# EAGLE board controllerpro (EAGLE 7.3.0)
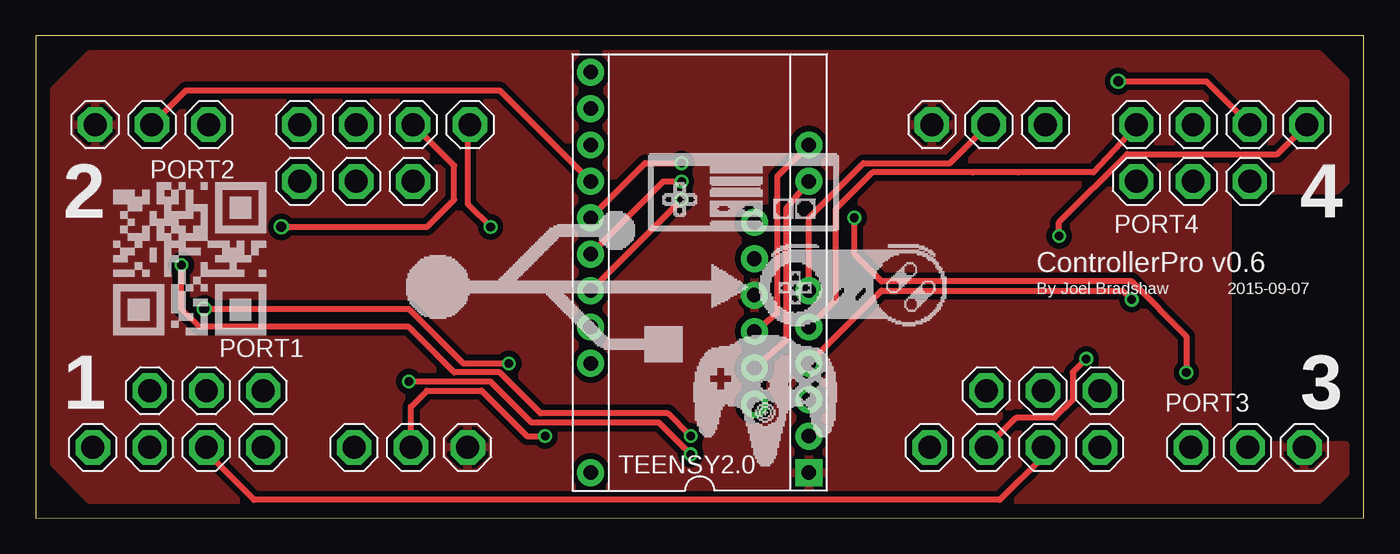
[diagram p0: board, top side]
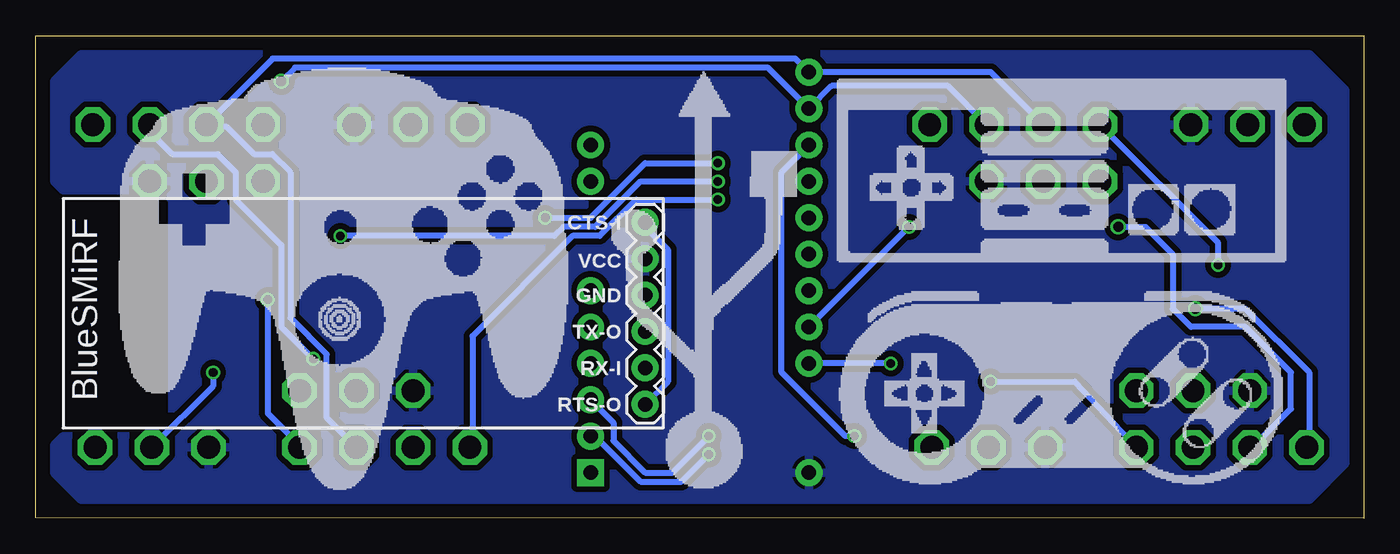
[diagram p1: board, bottom side, seen from below]

Size 92.71 x 33.66 mm. Coordinates in mm from the lower left corner, seen from the top.
Outline: 92.71,33.66 0,33.66 0,0 92.71,0.01 92.71,33.66
Copper layers (1*16): Top 0.0356mm / dielectric 1.5011mm / Bottom 0.0356mm
Design rules "LaenPCBOrder": minimum track width 6mil, minimum drill 13mil, track to track 6mil, track to pad 6mil, pad to pad 6mil, via to via 6mil, smd to smd 6mil, copper to edge 15mil, drill to drill 6mil, minimum pad ring 7mil, minimum via ring 7mil, stop-mask expansion 3mil, vias tented up to drill 0mil, thermal gap 10mil
Net classes: 0 default: width 0.406 mm, clearance 0.203 mm; 1 power: width 0.61 mm, clearance 0.305 mm

## Footprints (pad centres in the part's own frame; a part is rotated, then mirrored left to right if it is on the bottom)
NINTENDO-MULTI = drill 1.6 octagon: 1 -11.887,-3.962; 2 -7.925,-3.962; 3 -3.962,-3.962; 4 0,-3.962; 5 6.35,-3.962; 6 10.312,-3.962; 7 14.275,-3.962; 8 0,0; 9 -3.962,0; 10 -7.925,0
TEENSY_MC_BT_PINS = drill 1.016 pad 1.88: +5V -13.97,7.62; B0 -11.43,-7.62; B1 -8.89,-7.62; B2 -6.35,-7.62; B3 -3.81,-7.62; B4 8.89,7.62; B5 6.35,7.62; B6 3.81,7.62; B7 -1.27,-7.62; D2 6.35,-7.62; D3 8.89,-7.62; D6 13.97,7.62; D7 11.43,7.62; F4 -6.35,7.62; F5 -3.81,7.62; F6 -1.27,7.62; F7 1.27,7.62 | drill 1.016 pad 1.88 square: GND -13.97,-7.62
RN42 = drill 1.016 pad 1.88: CTS-I 0,6.35; GND 0,1.27; RTS-0 0,-6.35; RX-I 0,-3.81; TX-0 0,-1.27; VCC 0,3.81

## Placement (x,y rotation side)
PORT1  NINTENDO-MULTI  [NINTENDO-MULTI]  15.88,8.89 0 top
PORT2  NINTENDO-MULTI  [NINTENDO-MULTI]  18.41,23.5 180 top
PORT3  NINTENDO-MULTI  [NINTENDO-MULTI]  74.3,8.89 0 top
PORT4  NINTENDO-MULTI  [NINTENDO-MULTI]  76.83,23.5 180 top
TEENSY2.0  TEENSY_MC_BT_PINS  [TEENSY_MC_BT_PINS]  46.35,17.14 90 top
U$1  RN42  [RN42]  50.16,14.29 0 bottom

## Library data of the parts
PORT1-PORT4 TEENSY2.0 U$1 = custom

## Nets
3VDATA0: PORT3.6 TEENSY2.0.B6
3VDATA1: PORT4.6 TEENSY2.0.B7
3VDATA2: PORT1.6 TEENSY2.0.B4
3VDATA3: PORT2.6 TEENSY2.0.B5
5VDATA0: PORT3.4 TEENSY2.0.B2
5VDATA1: PORT4.4 TEENSY2.0.B3
5VDATA2: PORT1.4 TEENSY2.0.B0
5VDATA3: PORT2.4 TEENSY2.0.B1
CLOCK: PORT1.2 PORT2.2 PORT3.2 PORT4.2 TEENSY2.0.D7
GND [power]: PORT1.7 PORT2.7 PORT3.7 PORT4.7 TEENSY2.0.GND U$1.GND
LATCH: PORT1.3 PORT2.3 PORT3.3 PORT4.3 TEENSY2.0.D6
N$2: TEENSY2.0.D2 U$1.RX-I
N$5: TEENSY2.0.D3 U$1.TX-0
N$6: U$1.CTS-I U$1.RTS-0
S_OR_NES0: PORT3.1 TEENSY2.0.F6
S_OR_NES1: PORT4.1 TEENSY2.0.F7
S_OR_NES2: PORT1.1 TEENSY2.0.F4
S_OR_NES3: PORT2.1 TEENSY2.0.F5
VCC [power]: PORT1.5 PORT1.10 PORT2.5 PORT2.10 PORT3.5 PORT3.10 PORT4.5 PORT4.10 TEENSY2.0.+5V U$1.VCC

## Tracks (layer width: path | path; a pad name or v marks a point on that pad's centre or on a via)
3VDATA0  (via drill 0.6)
  Top 0.406: v57.15,20.95 57.15,18.41 59.05,16.51 76.52,16.51 80.33,12.7 v80.33,10.16 | TEENSY2.0.B6 42.55,24.77 v45.09,24.77
  Bottom 0.406: v57.15,20.95 53.98,20.95 50.16,24.77 v45.09,24.77 | v80.33,10.16 80.33,9.21 PORT3.6
3VDATA1
  Top 0.406: TEENSY2.0.B7 53.98,20.95 57.78,24.77 63.83,24.77 PORT4.6
3VDATA2  (via drill 0.6)
  Top 0.406: PORT1.6 26.19,7.77 27.3,8.89 31.11,8.89 34.29,5.71 v35.56,5.71
  Bottom 0.406: v35.56,5.71 36.2,5.71 40.64,10.16 40.64,24.13 TEENSY2.0.B4
3VDATA3
  Top 0.406: PORT2.6 10.49,29.84 32.38,29.84 TEENSY2.0.B5
5VDATA0  (via drill 0.6)
  Top 0.406: TEENSY2.0.B2 59.05,15.88 75.88,15.88 v76.52,15.24
  Bottom 0.406: v76.52,15.24 76.52,7.3 74.3,5.08 PORT3.4
5VDATA1
  Top 0.406: TEENSY2.0.B3 55.88,15.24 55.88,21.59 58.42,24.13 65.41,24.13 68.58,24.13 73.83,24.13 76.2,26.67 76.83,27.3 PORT4.4
5VDATA2  (via drill 0.6)
  Top 0.406: v45.72,4.45 43.5,6.67 34.61,6.67 31.75,9.53 v26.04,9.53
  Bottom 0.406: PORT1.4 20.17,9.53 v26.04,9.53 | TEENSY2.0.B0 53.66,5.71 50.48,2.54 47.62,2.54 v45.72,4.45
5VDATA3  (via drill 0.6)
  Top 0.406: v10.16,17.65 10.16,14.61 11.43,13.34 26.04,13.34 29.21,10.16 32.38,10.16 35.24,7.3 44.13,7.3 v45.72,5.71
  Bottom 0.406: v10.16,17.65 10.16,19.2 PORT2.4 | TEENSY2.0.B1 52.39,6.67 52.39,5.4 50.16,3.17 48.26,3.17 v45.72,5.71
CLOCK  (via drill 0.6, 0.7)
  Top 0.406: v17.14,20.32 27.3,20.32 29.21,22.23 29.21,24.59 PORT2.2 | PORT4.2 81.74,30.48 v75.56,30.48 | v73.34,11.11 72.39,10.16 72.39,8.26 71.12,6.99 68.43,6.99 PORT3.2
  Bottom 0.406: 26.52,27.46 PORT2.2 29.05,30.16 37.15,30.16 TEENSY2.0.D7 41.59,31.43 74.61,31.43 v75.56,30.48 | PORT1.2 7.77,4.93 5.08,7.62 5.08,10.16 8.26,13.34 12.06,13.34 13.34,14.61 13.34,18.41 15.24,20.32 v17.14,20.32 | PORT4.2 84.76,26.98 83.19,25.4 80.01,25.4 78.74,24.13 78.74,22.23 75.56,19.05 75.56,13.34 v73.34,11.11
GND
  Bottom 0.61: 62.4,27.46 PORT4.7
  pour Top (isolate 0.406): 91.44,3.17 89.53,1.27 3.81,1.27 1.27,3.81 1.27,29.84 3.81,32.38 89.53,32.38 91.44,30.48 91.44,23.5 90.81,22.86 83.19,22.86 83.19,5.08 91.44,5.08
LATCH
  Top 0.406: PORT1.3 11.91,4.6 15.24,1.27 67.31,1.27 70.33,4.29 PORT3.3
  Bottom 0.406: PORT2.3 26.04,31.11 TEENSY2.0.D6 39.69,32.07 76.19,32.07 PORT4.3 80.64,27.3 79.38,27.3 77.47,25.4 76.2,25.4 74.93,24.13 74.93,13.97 72.39,11.43 72.39,6.99 PORT3.3
N$2
  Top 0.406: TEENSY2.0.D2 52.39,21.59 52.39,12.38 U$1.RX-I
N$5
  Top 0.406: U$1.TX-0 51.75,14.29 51.75,23.81 TEENSY2.0.D3
N$6
  Bottom 0.406: U$1.CTS-I 50.16,20.32 48.58,18.73 48.58,9.53 U$1.RTS-0
S_OR_NES0  (via drill 0.6)
  Top 0.406: v45.09,22.23 TEENSY2.0.F6
  Bottom 0.406: PORT3.1 62.23,5.11 62.23,12.7 55.24,19.68 53.34,19.68 50.8,22.23 v45.09,22.23
S_OR_NES1  (via drill 0.6)
  Top 0.406: TEENSY2.0.F7 43.81,23.5 v45.09,23.5 | v71.44,19.68 71.44,20.64 76.2,25.4 86.67,25.4 PORT4.1
  Bottom 0.406: v71.44,19.68 56.52,19.68 55.88,20.32 53.66,20.32 50.48,23.5 v45.09,23.5
S_OR_NES2  (via drill 0.6, 0.7)
  Top 0.406: v11.75,14.61 26.04,14.61 29.84,10.79 v33.02,10.79
  Bottom 0.406: PORT1.1 3.81,5.11 3.81,10.16 8.26,14.61 v11.75,14.61 | v33.02,10.79 TEENSY2.0.F4
S_OR_NES3  (via drill 0.6)
  Top 0.406: PORT2.1 30.16,27.32 30.16,21.91 v31.75,20.32
  Bottom 0.406: v31.75,20.32 TEENSY2.0.F5
VCC
  pour Bottom (isolate 0.406, rank 2): 91.44,3.17 89.53,1.27 3.81,1.27 1.27,3.81 1.27,29.84 3.81,32.38 89.53,32.38 91.44,30.48 91.44,23.5 90.81,22.86 83.82,22.86 83.19,22.23 83.19,6.35 83.82,5.71 90.81,5.71 91.44,5.08

## Text on the board
tNames: 2 | 4 | ControllerPro v0.6 | By Joel Bradshaw | 2015-09-07 | 1 | 3
bNames: BlueSMiRF